# Altium PCB Analog_TestBoard.PcbDoc
Units mil, origin at the board's own origin, x right, y up, seen from the top; angles counter-clockwise.
Board outline 2154 x 1772 mil, 2 copper layers (Top Layer, Bottom Layer); 94 components, 43 nets, 214 pads, 24 vias.
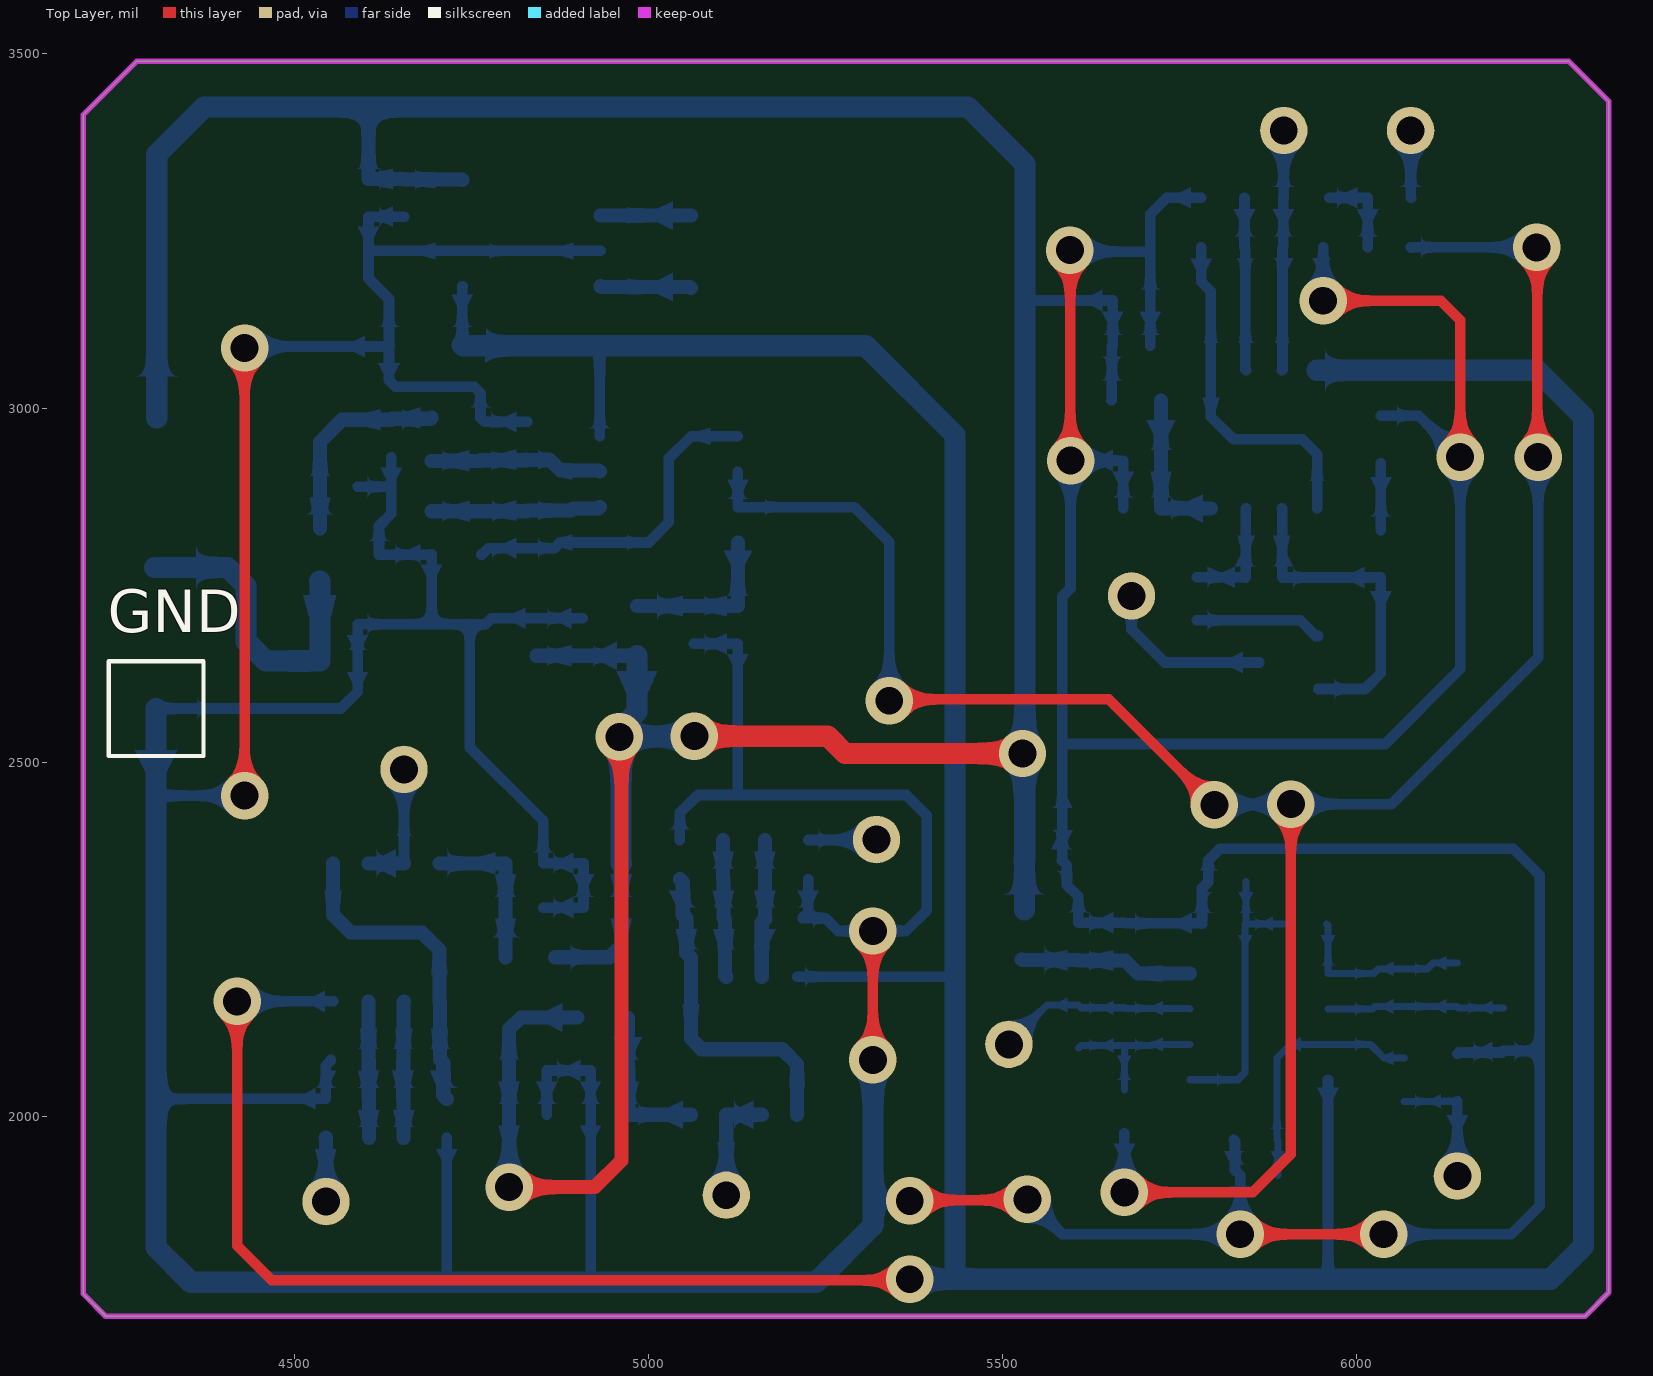
[diagram p0: Top Layer view]
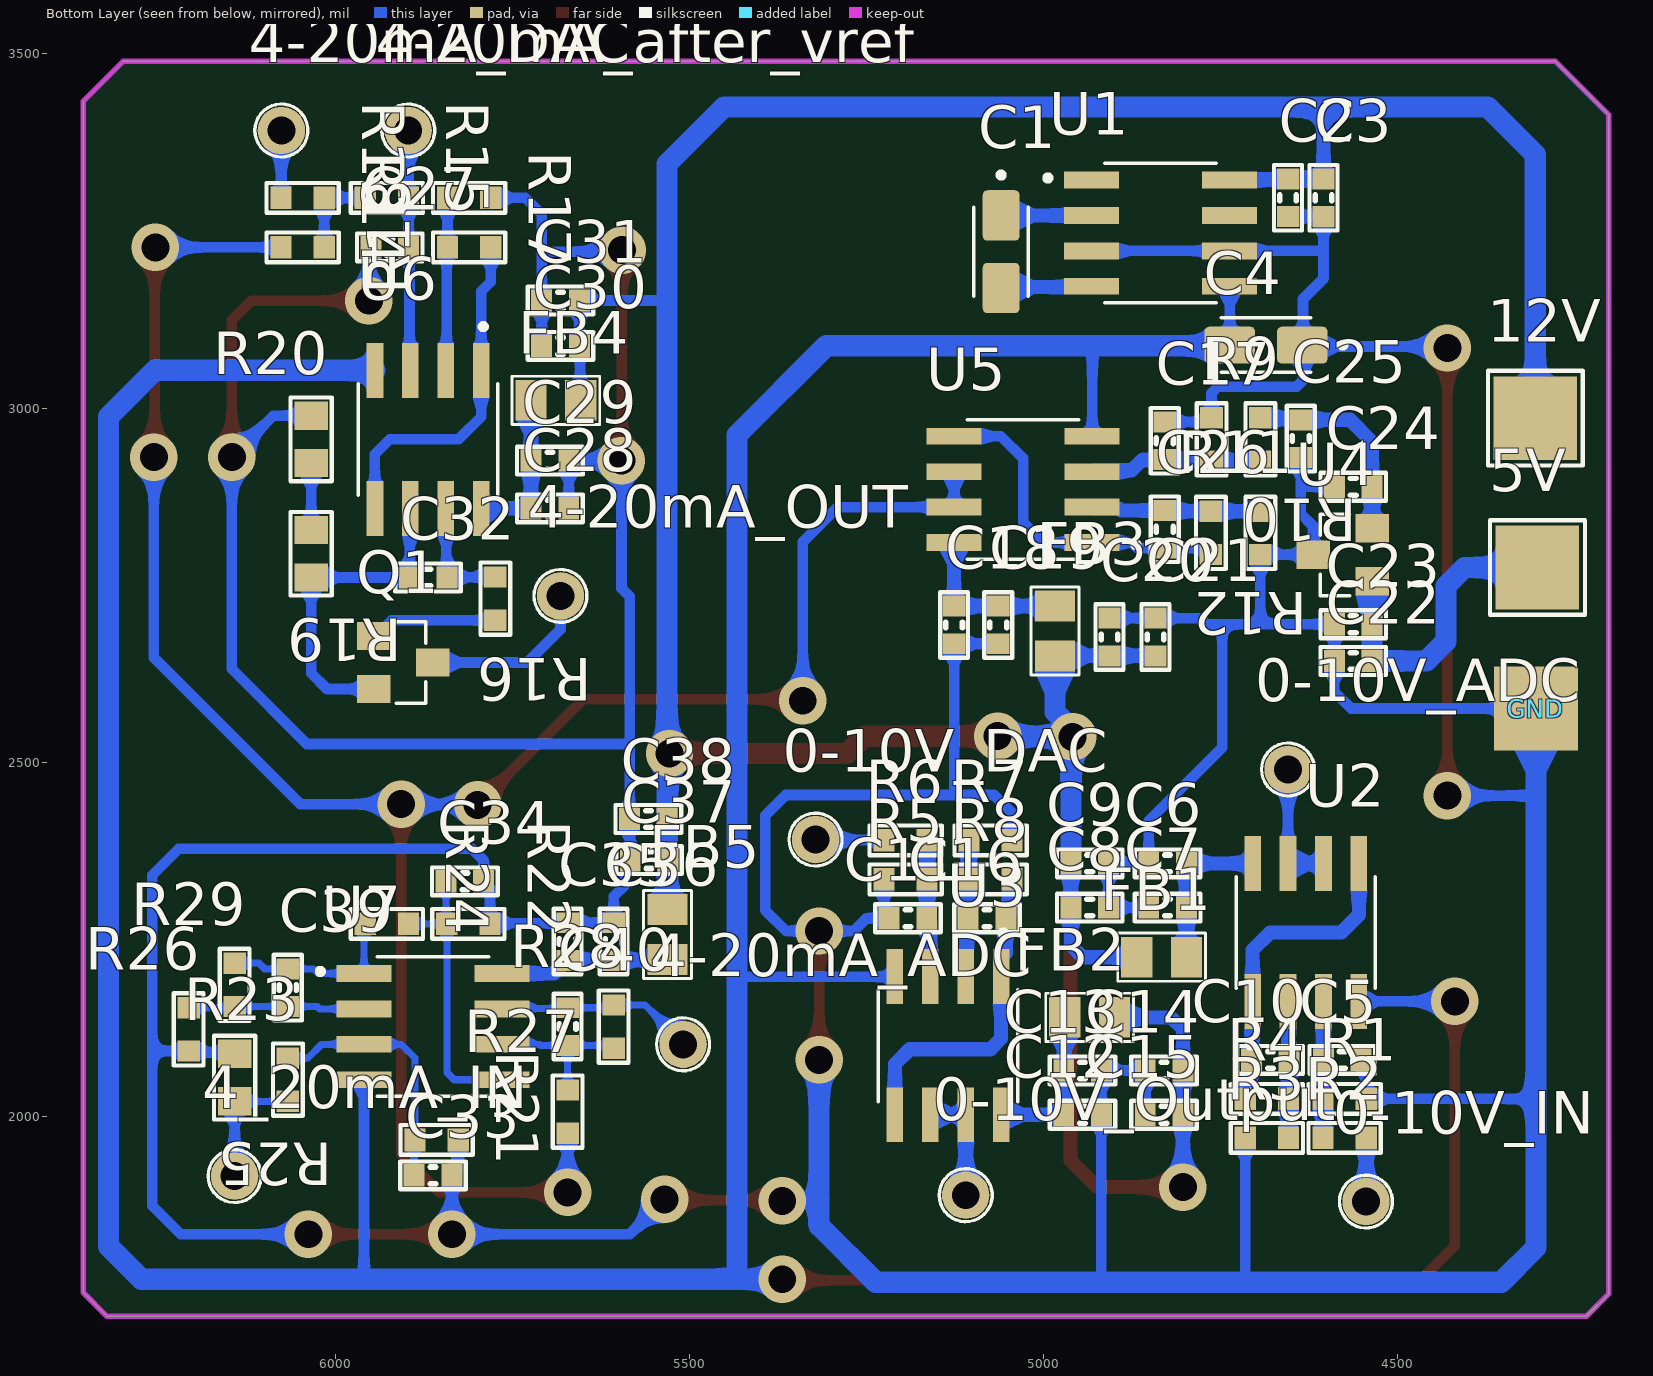
[diagram p1: Bottom Layer view, seen from below]
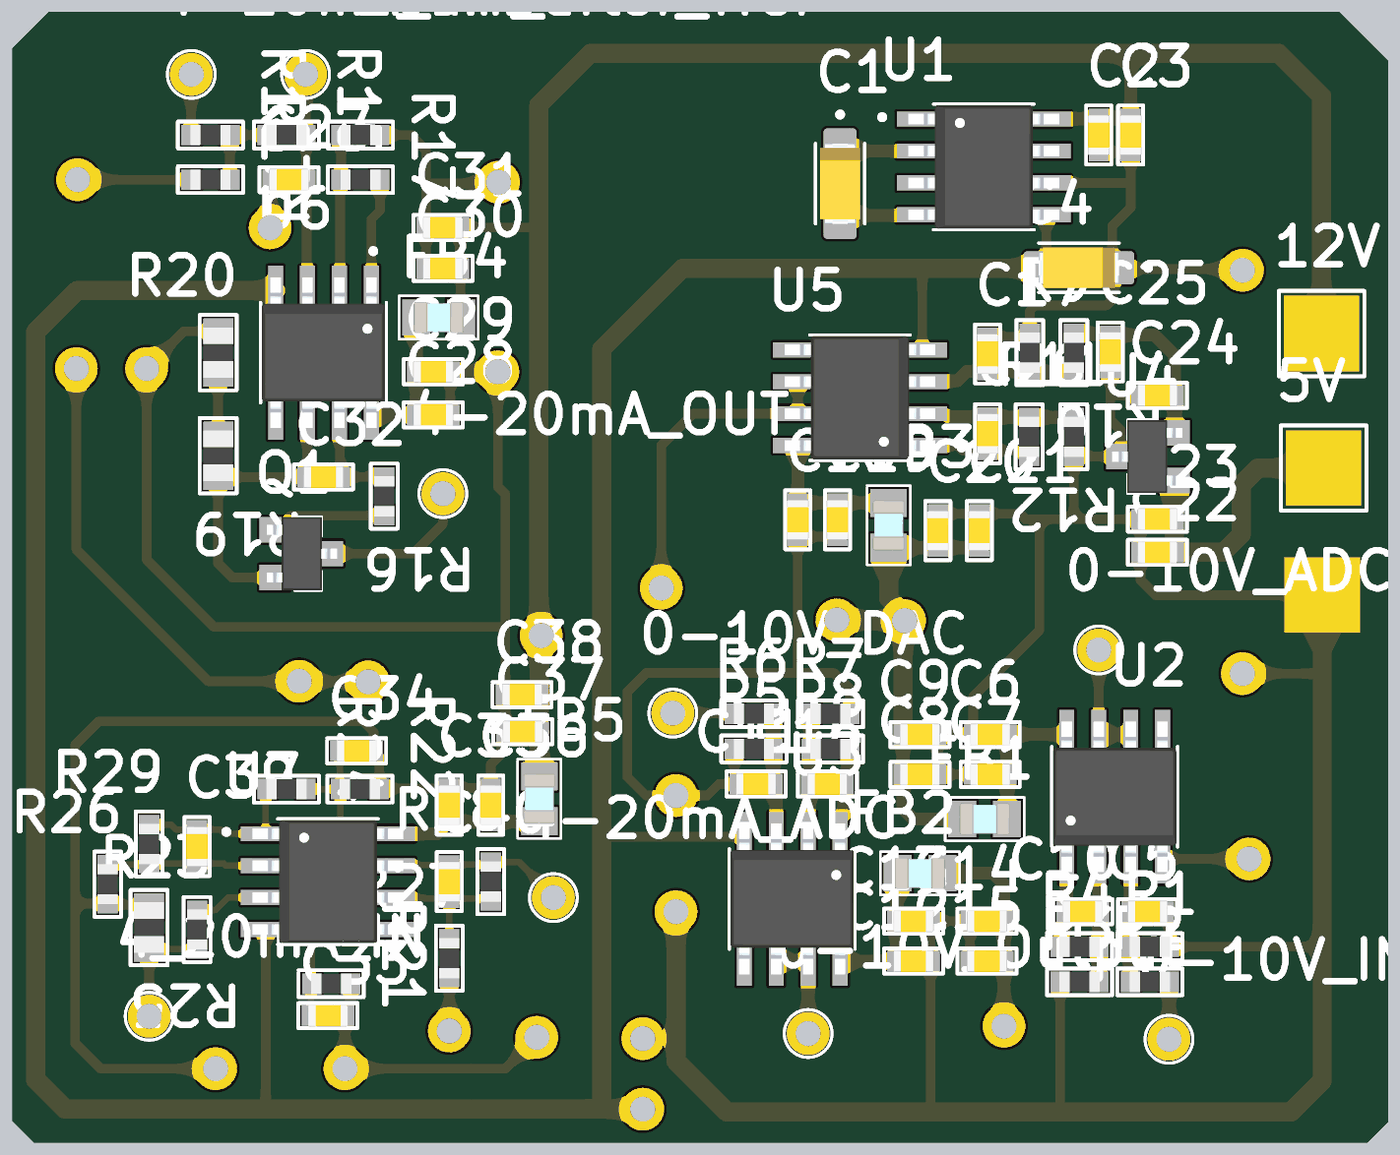
[diagram p2: 3D render of the assembled board from below, using the file's embedded part models]

## Layer stack, top to bottom
Top Solder: solder mask 0.4, Solder Resist, Dk 3.5
Top Layer: signal copper 1.4
Dielectric 1: dielectric 12.6, FR-4, Dk 4.8
Bottom Layer: signal copper 1.4
Bottom Solder: solder mask 0.4, Solder Resist, Dk 3.5

## Board outline
4202,1750 4202,3414 4278,3490 6299,3490 6356,3433 6356,1752 6322,1718 4234,1718

## Design rules (kind name [scope] priority, off if disabled: settings)
Clearance [All] p1: gap=15 ignorepadtopadclearanceinfootprint=FALSE
PolygonConnect [All] p1: connectstyle=Relief reliefconductorwidth=10 reliefentries=4 polygonreliefangle="90 Angle" airgapwidth=10
RoutingVias [All] p1: holewidth=39.37 width=66.93 viastyle="Through Hole" minholewidth=39.37 minwidth=66.93 maxholewidth=39.37 maxwidth=66.93
SolderMaskExpansion [All] p1: expansion=4 istentingtop=FALSE
SupplyNets "Schematic Supply Nets_11" [InNet('12V_FILTER_2')] p1: voltage=0.000
SupplyNets "Schematic Supply Nets_10" [InNet('GND')] p2: voltage=0.000
SupplyNets "Schematic Supply Nets_9" [InNet('-12V')] p3: voltage=0.000
SupplyNets "Schematic Supply Nets_8" [InNet('12V_FILTER_1')] p4: voltage=0.000
SupplyNets "Schematic Supply Nets_6" [InNet('12V_FILTER_3')] p5: voltage=0.000
SupplyNets "Schematic Supply Nets_5" [InNet('12V_FILTER_5')] p6: voltage=0.000
SupplyNets "Schematic Supply Nets_3" [InNet('12V_FILTER_4')] p7: voltage=0.000
SupplyNets "Schematic Supply Nets_2" [InNet('2V5')] p8: voltage=0.000
SupplyNets "Schematic Supply Nets_1" [InNet('12V')] p9: voltage=0.000
SupplyNets "Schematic Supply Nets" [InNet('5V')] p10: voltage=0.000
Width [All] p1: maxlimit=30 minlimit=10 preferedwidth=15
30 further rules are at their usual default settings.

## Classes and differential pairs
component class Power_Supply: 12V C1 C2 C3 C4 GND U1
component class 4-20mA_Converter: 4-20mA_ADC 4-20mA_after_vref 4-20mA_DAC 4-20mA_OUT 4_20mA_IN 5V C17 C18 C19 C20 C21 C22 C23 C24 C25 C26 C27 C28 C29 C30 C31 C32 C33 C34 C35 C36 C37 C38 C39 C40 FB3 FB4 FB5 Q1 R9 R10 R11 R12 R13 R14 R15 R16 R17 R18 R19 R20 R21 R22 R23 R24 R25 R26 R27 R28 R29 U4 U5 U6 U7
component class 0-10V_Converter: 0-10V_ADC 0-10V_DAC 0-10V_IN 0-10V_Output C5 C6 C7 C8 C9 C10 C11 C12 C13 C14 C15 C16 FB1 FB2 R1 R2 R3 R4 R5 R6 R7 R8 U2 U3

## Components (designator, comment, footprint, x,y, rotation, side; value= is the part's Value field where it differs from the comment)
0-10V_ADC "0-10V_ADC" TestPoint_THTPad_D1.5mm_Drill0.7mm 4655,2490 r90 bottom
0-10V_DAC "0-10V_DAC" TestPoint_THTPad_D1.5mm_Drill0.7mm 5322,2391 r270 bottom
0-10V_IN "0-10V_IN" TestPoint_THTPad_D1.5mm_Drill0.7mm 4545,1880 r90 bottom
0-10V_Output "0-10V_Output" TestPoint_THTPad_D1.5mm_Drill0.7mm 5110,1889 r270 bottom
4-20mA_ADC "4-20mA_ADC" TestPoint_THTPad_D1.5mm_Drill0.7mm 5509,2102 r90 bottom
4-20mA_after_vref "4-20mA_after_vref" TestPoint_THTPad_D1.5mm_Drill0.7mm 5897,3392 r0 bottom
4-20mA_DAC "4-20mA_DAC" TestPoint_THTPad_D1.5mm_Drill0.7mm 6076,3392 r0 bottom
4-20mA_OUT "4-20mA_OUT" TestPoint_THTPad_D1.5mm_Drill0.7mm 5682,2735 r0 bottom
4_20mA_IN "4_20mA_IN" TestPoint_THTPad_D1.5mm_Drill0.7mm 6142,1916 r90 bottom
5V "Testpoint_SMD" TestPoint_Pad_3.0x3.0mm#1 4303,2775 r90 bottom
12V "Testpoint_SMD" TestPoint_Pad_3.0x3.0mm#1 4306,2986 r180 bottom
C1 "10uF/16V" TanTa_Cap_A 5060,3220.82 r270 bottom
C2 "100nF/50V" CAP_0603 4655,3297 r90 bottom
C3 "10uF/16V" CAP_0603 4605,3297 r90 bottom
C4 "10uF/16V" TanTa_Cap_A 4686,3089 r0 bottom
C5 "2.2nF/50V" CAP_0603 4578.43,2080 r180 bottom
C6 "100nF/50V" CAP_0603 4825,2357.44 r180 bottom
C7 "10uF/16V" CAP_0603 4825,2295 r180 bottom
C8 "100nF/50V" CAP_0603 4935,2295 r0 bottom
C9 "10uF/16V" CAP_0603 4935,2357.44 r0 bottom
C10 "2.2nF/50V" CAP_0603 4680,2080 r0 bottom
C11 "2.2nF/50V" CAP_0603 5191.57,2280 r0 bottom
C12 "100nF/50V" CAP_0603 4945,2002.56 r0 bottom
C13 "10uF/16V" CAP_0603 4945,2065 r0 bottom
C14 "100nF/50V" CAP_0603 4830,2065 r180 bottom
C15 "10uF/16V" CAP_0603 4830,2002.56 r180 bottom
C16 "2.2nF/50V" CAP_0603 5080,2280 r180 bottom
C17 "2.2nF/50V" CAP_0603 4829,2954 r90 bottom
C18 "100nF/50V" CAP_0603 5126.32,2694 r90 bottom
C19 "10uF/16V" CAP_0603 5064,2694 r90 bottom
C20 "100nF/50V" CAP_0603 4907,2677 r270 bottom
C21 "10uF/16V" CAP_0603 4842,2677 r270 bottom
C22 "10uF/16V" CAP_0603 4563,2643 r180 bottom
C23 "100nF/50V" CAP_0603 4563,2695 r180 bottom
C24 "100nF/50V" CAP_0603 4563,2889 r180 bottom
C25 "10uF/6.3V" CAP_0603 4637,2957 r90 bottom
C26 "2.2nF/50V" CAP_0603 4829,2829 r270 bottom
C27 "470pF/50V" CAP_0603 5923,3227 r180 bottom
C28 "100nF/50V" CAP_0603 5697,2858.56 r0 bottom
C29 "10uF/16V" CAP_0603 5697,2926 r0 bottom
C30 "100nF/50V" CAP_0603 5682,3088 r180 bottom
C31 "10uF/16V" CAP_0603 5682,3152 r180 bottom
C32 "100nF/50V" CAP_0603 5869,2761 r180 bottom
C33 "2.2nF/50V" CAP_0603 5862,1917 r180 bottom
C34 "2.2nF/50V" CAP_0603 5817,2332 r180 bottom
C35 "100nF/50V" CAP_0603 5672,2247 r270 bottom
C36 "10uF/16V" CAP_0603 5607,2247 r270 bottom
C37 "100nF/50V" CAP_0603 5557,2362 r180 bottom
C38 "10uF/16V" CAP_0603 5558,2420 r180 bottom
C39 "2.2nF/50V" CAP_0603 6067,2182 r90 bottom
C40 "2.2nF/50V" CAP_0603 5672,2127 r90 bottom
FB1 "120Ohm" Ferrite_Bead_0805 4833.53,2225 r0 bottom
FB2 "120Ohm" Ferrite_Bead_0805 4935,2140 r180 bottom
FB3 "120Ohm" Ferrite_Bead_0805 4984,2685.47 r270 bottom
FB4 "120Ohm" Ferrite_Bead_0805 5688.47,3011 r180 bottom
FB5 "120Ohm" Ferrite_Bead_0805 5531,2257 r90 bottom
GND "Testpoint_SMD" TestPoint_Pad_3.0x3.0mm#2 4305,2576 r0 top
Q1 "SI2308" SOT-23 5904,2641 r270 bottom
R1 "30K/1%/1_10W" Resistor_0603 4575,2025 r180 bottom
R2 "100K/1%/1_10W" Resistor_0603 4575,1970 r0 bottom
R3 "100K/1%/1_10W" Resistor_0603 4685,1970 r180 bottom
R4 "30K/1%/1_10W" Resistor_0603 4685,2025 r0 bottom
R5 "100K/1%/1_10W" Resistor_0603 5195,2335 r0 bottom
R6 "30K/1%/1_10W" Resistor_0603 5195,2390 r180 bottom
R7 "30K/1%/1_10W" Resistor_0603 5075,2390 r0 bottom
R8 "100K/1%/1_10W" Resistor_0603 5075,2335 r180 bottom
R9 "30K/1%/1_10W" Resistor_0603 4763,2956 r90 bottom
R10 "100K/1%/1_10W" Resistor_0603 4694,2956 r270 bottom
R11 "100K/1%/1_10W" Resistor_0603 4694,2824 r90 bottom
R12 "30K/1%/1_10W" Resistor_0603 4764,2824 r270 bottom
R13 "100K/1%/1_10W" Resistor_0603 6046,3297 r180 bottom
R14 "100K/1%/1_10W" Resistor_0603 6046,3227 r180 bottom
R15 "51R/5%/1_10W" Resistor_0603 5927,3297 r180 bottom
R16 "100R/1%/1_8W" Resistor_0603 5774,2731 r270 bottom
R17 "100K/1%/1_10W" Resistor_0603 5811,3227 r180 bottom
R18 "100K/1%/1_10W" Resistor_0603 5811,3297 r0 bottom
R19 "180R/1%/1_8W" Resistor_0805 6034,2794.5 r270 bottom
R20 "8.2R/5%/1_8W" Resistor_0805 6034,2956 r90 bottom
R21 "56K/1%/1_10W" Resistor_0603 5857,1967 r180 bottom
R22 "100K/1%/1_10W" Resistor_0603 5812,2272 r180 bottom
R23 "53.6K/1%/1_10W" Resistor_0603 6067,2052 r90 bottom
R24 "100K/1%/1_10W" Resistor_0603 5927,2272 r180 bottom
R25 "180R/1%/1_8W" Resistor_0805 6142,2055 r270 bottom
R26 "53.6K/1%/1_10W" Resistor_0603 6207,2123 r90 bottom
R27 "100K/1%/1_10W" Resistor_0603 5672,2007 r90 bottom
R28 "100K/1%/1_10W" Resistor_0603 5607,2127 r90 bottom
R29 "56K/1%/1_10W" Resistor_0603 6142,2186 r90 bottom
U1 "ICL7662CBA" SOIC-8 4835,3247 r180 bottom
U2 "NE5532DR" SOIC-8 4630,2260 r90 bottom
U3 "NE5532DR" SOIC-8 5135,2100 r270 bottom
U4 "MCP1525T-I/TT" SOT-23 4578,2793 r90 bottom
U5 "NE5532DR" SOIC-8 5028.88,2885.38 r0 bottom
U6 "NE5532DR" SOIC-8 5869,2956 r270 bottom
U7 "NE5532DR" SOIC-8 5862,2127 r180 bottom

## Footprints (in the part's own frame and the unit in brackets; to place one, negate y for a bottom-side part, rotate by r counter-clockwise, add the part's x,y. Pads: shape width x height; smd on the part's side, far side on the other; paste and mask are expansions set on the pad)
CAP_0603 [mm]
  rect 0.75x0.8 smd: 1(-0.675,0) 2(0.675,0)
  silkscreen extent -1.17,-0.5 1.17,0.5, body extent -0.8,-0.43 0.8,0.43, height 0.8
Ferrite_Bead_0805 [mil] "Ferrite  Bead, body 2.00x1.20mm"
  rect 44x57 smd: 1(-35.11,0) 2(35.11,0)
  silkscreen extent -62,-34 62,34, body extent -39,-25 39,25, height 41
Resistor_0603 [mil]
  rect 30x32 smd: 1(-30.5,0) 2(30.5,0)
  silkscreen extent -51,-21 51,21, body extent -31,-16 31,16, height 28
Resistor_0805 [mil] "Chip Resistor, 2-Leads, Body 2,00x1,20mm, IPC Medium Density"
  rect 40x47 smd: 1(-33.5,0) 2(33.5,0)
  silkscreen extent -59,-29 59,29, body extent -39,-24 39,24, height 28
SOIC-8 [mm]
  rect 1.97x0.6 smd: 1(-2.475,1.905) 2(-2.475,0.635) 3(-2.475,-0.635) 4(-2.475,-1.905) 5(2.475,-1.905) 6(2.475,-0.635) 7(2.475,0.635) 8(2.475,1.905)
  silkscreen extent -4.14,-2.5 2,2.5, body extent -3,-2.45 3,2.45, height 1.7
SOT-23 [mm]
  rect 1.016x1.2 smd: 1(-0.95,-1.06) 2(0.95,-1.06) 3(0,1.06)
  silkscreen extent -1.46,-0.25 1.46,0.8, body extent -1.45,-1.37 1.45,1.43, height 1.3
TanTa_Cap_A [mm] "Size 1206"
  rrect25% 1.81x1.32 smd: 1(-1.3,0) 2(1.3,0)
  silkscreen extent -2.85,-0.98 1.6,0.98, body extent -1.6,-0.8 1.6,0.8, height 1.8
TestPoint_Pad_3.0x3.0mm#1 [mm]
  rect 3x3 smd paste-2539.97 mask+0: 1(0,0)
  silkscreen extent -1.7,-1.7 1.7,1.7
TestPoint_Pad_3.0x3.0mm#2 [mm]
  rect 3x3 smd far side paste-2539.97 mask+0: 1(0,0)
  silkscreen extent -1.7,-1.7 1.7,1.7
TestPoint_THTPad_D1.5mm_Drill0.7mm [mm]
  round 1.7 / inner round 1.524 / far side round 1.7 hole 1 paste-2539.97 mask+0: 1(0,0)
  silkscreen extent -0.95,-0.95 0.95,0.95

## Part data
0-10V_ADC 0-10V_DAC 0-10V_IN 0-10V_Output 4-20mA_ADC 4-20mA_after_vref 4-20mA_DAC 4-20mA_OUT 4_20mA_IN: library part Testpoint_TH, "Test Point TEST-1BK", Supply Name=BanLinhKien, Supply Part Number="Test Point TEST-1BK", Supply URL=https://banlinhkien.com/test-point-test1bk-mau-den-5c-p18255999.html
C1 C4: library part Tanta_Cap_10uF_16V_1206, "Tantalum Capacitors 10uF 16V 1206", Supply Part Number=AVX, Supply Name="1206 AVX"
C2 C6 C8 C12 C14 C18 C20 C23 C24 C28 C30 C32 C35 C37: library part Ceramic_Cap_100nF_50V_0603, "CAP, size 0603, 100nF, 50V", Supply Part Number="Tụ Gốm 0603 100nF (0.1uF) 50V", Supply Name=Thegioiic, Supply URL=https://www.thegioiic.com/tu-gom-0603-100nf-0-1uf-50v
C3 C7 C9 C13 C15 C19 C21 C22 C29 C31 C36 C38: library part Ceramic_Cap_10uF_16V_0603, "CAP, size 0603, 10uF, 16V", Supply Part Number="Tụ Gốm 0603 10uF 16V", Supply Name=Thegioiic, Supply URL=https://www.thegioiic.com/tu-gom-0603-10uf-16v
C5 C10 C11 C16 C17 C26 C33 C34 C39 C40: library part Ceramic_Cap_2.2nF_50V_0603, "CAP, size 0603, 2.2nF, 50V", Supply Part Number=CC0603KRX7R9BB222, Supply Name=tme, Supply URL=http://www.tme.vn/Product.aspx?id=1310#page=pro_info
C25: library part Ceramic_Cap_10uF_6.3V_0603, "CAP, size 0603, 10uF, 6.3V", Supply Part Number=CC0603KRX5R5BB106, Supply Name=tme, Supply URL=http://www.tme.vn/Product.aspx?id=1165#page=pro_info
C27: library part Ceramic_Cap_470pF_50V_0603, "CAP, size 0603, 470pF, 50V", Supply Part Number="Tụ Gốm 0603 470pF 50V", Supply Name=Thegioiic, Supply URL=https://www.thegioiic.com/tu-gom-0603-470pf-50v
FB1 FB2 FB3 FB4 FB5: library part Ferrite_Bead_120Ohm_2A_0805, "Ferrite Bead, size 0805, 120Ohm, 2A", Supply Part Number="CBW201209U121T Ferrite Beads 2A 120 Ohm 0805", Supply Name=Thegioiic, Supply URL=https://www.thegioiic.com/cbw201209u121t-ferrite-beads-2a-120-ohm-0805
Q1: "SI2308 SOT23 MOSFET N-CH 2A 60V", datasheet=https://www.mouser.vn/datasheet/2/427/si2308bd-1765649.pdf, Supply Name=BanLinhKien, Supply Part Number="SI2308 SOT23 MOSFET N-CH 2A 60V", Supply URL=https://banlinhkien.com/si2308-sot23-mosfet-nch-2a-60v-smda8s-5c-p15289840.html
R1 R4 R6 R7 R9 R12: library part Res_30K_0603_1%, "Resistor 0603 30KOhm 1% 1_10W", Supply Part Number="Điện Trở 30 KOhm 0603 1%", Supply Name=LinhkienX, Supply URL=https://linhkienx.com/vi/dien-tro-30-kohm-0603-1-
R2 R3 R5 R8 R10 R11 R13 R14 R17 R18 R22 R24 R27 R28: library part Res_100K_0603_1%, "Resistor 0603 100KOhm 1% 1_10W", Supply Part Number="Điện Trở 100 KOhm 0603 1%", Supply Name=Thegioiic, Supply URL=https://www.thegioiic.com/dien-tro-100-kohm-0603-1-
R15: library part Res_51R_0603_5%, "Resistor 0603 51 Ohm 5% 1_10W", Supply Part Number="Điện Trở 51 Ohm 0603 5%", Supply Name=Thegioiic, Supply URL=https://www.thegioiic.com/dien-tro-51-ohm-0603-5-
R16: library part Res_100R_0805_1%, "Resistor 0805 100 Ohm 1% 1_8W", Supply Part Number="Điện Trở 100 Ohm 0805 1%", Supply Name=Thegioiic, Supply URL=https://www.thegioiic.com/dien-tro-100-ohm-0805-1-
R19 R25: library part Res_180R_0805_1%, "Resistor 0805 180 Ohm 1% 1_8W", Supply Part Number="Điện Trở 180 Ohm 0805 1%", Supply Name=Thegioiic, Supply URL=https://www.thegioiic.com/dien-tro-180-ohm-0805-1-
R20: library part Res_8.2R_0805_5%, "Resistor 0805 8.2 Ohm 5% 1_8W", Supply Part Number="Điện Trở 8.2 Ohm 0805 5%", Supply Name=Thegioiic, Supply URL=https://www.thegioiic.com/dien-tro-8-2-ohm-0805-5-
R21 R29: library part Res_56K_0603_1%, "Resistor 0603 56KOhm 1% 1_10W", Supply Part Number="Điện Trở 56 KOhm 0603 1%", Supply Name=Thegioiic, Supply URL=https://www.thegioiic.com/dien-tro-56-kohm-0603-1-
R23 R26: library part Res_53.6K_0603_1%, "Resistor 0603 53.6KOhm 1% 1_10W", Supply Part Number="Điện Trở 53.6 KOhm 0603 1%", Supply Name=Thegioiic, Supply URL=https://www.thegioiic.com/dien-tro-53-6-kohm-0603-1-
U1: "Vin: 4.5V ~ 20V, Vout: -Vin, 8-SOIC", Supply Part Number="IC Dán ICL7662", datasheet=https://www.analog.com/media/en/technical-documentation/data-sheets/icl7662-si7661.pdf, Supply Name=Chipn24, Supply URL=https://chipn24.com/sop-ic-dan-icl7662-sop-8-smd-icl7662cba-id9015.html
U2 U3 U5 U6 U7: "Low Noise Single/Dual Operational Amplifier - SOIC-8", datasheet=https://www.ti.com/lit/ds/symlink/ne5532.pdf, Supply Name=tme, Supply Part Number=NE5532DR, Supply URL=http://www.tme.vn/Product.aspx?id=2122#page=pro_info
U4: "Voltage Reference IC 2.5V", Supply Part Number="MCP1525T-I/TT IC Tham Chiếu Điện Áp 2.5V SOT-23", datasheet=https://ww1.microchip.com/downloads/aemDocuments/documents/APID/ProductDocuments/DataSheets/21653C.pdf, Supply Name=Thegioiic, Supply URL=https://www.thegioiic.com/mcp1525t-i-tt-ic-tham-chieu-dien-ap-2-5v-sot-23

## Via types
v1: diameter 66.93, hole 39.37, Top Layer to Bottom Layer, 24 vias

## Nets (pads, with @x,y where several pads share a name; then routed paths per layer and width w, separated by ;. In a path a pad name is that pad's centre, name@x,y a point inside that pad or via, vN(x,y) a via of type N, cw(c..) or ccw(c..) an arc to the next point about the centre after c; other vN are vias at no path point)
2V5: C24.2 C25.2 R10.1 U4.2 | length 293.8
  Bottom Layer w20: U4.2 4536.35,2830.48 4536.35,2888.92 C24.2 4536.43,2952.43 4567.57,2983.57 C25.2 4638.46,2985.04 4692.54,2985.04 R10.1
5V: 5V.1 C22.2 C23.2 U4.1 | length 446.5
  Bottom Layer w30: 5V.1 4406,2775 4432,2749 4432,2671 4460,2643 C22.2 C23.2 4536.35,2695.08 4536.35,2755.52 U4.1
12V: 12V.1 C2.2 C3.2 C8.2 C9.2 C14.2 C15.2 C20.2 C21.2 C30.2 C31.2 C37.2 C38.2 FB1.2 FB2.2 FB3.2 FB4.2 FB5.2 U1.8 | length 5553.9
  Top Layer w20: v1(4803.43,1900.43) 4924.43,1900.43 4962,1938 4962,2533 v1(4959,2536)
  Top Layer w30: v1(5065,2537) 5253.25,2537 5277.76,2512.48 v1(5528.11,2512.48)
  Bottom Layer w15: 5531.52,3157 5536.52,3152 C31.2 C30.2 5654.39,3086.97 5654.39,3012.03 FB4.2 FB4.2@5653.89,3011.53
  Bottom Layer w20: 4605,3425 C3.2 C2.2 4655.79,3322.79 4736.77,3322.79 U1.8 ; v1(4803.43,1900.43) C15.2 C14.2 4803.43,2123.43 4820,2140 FB2.2 ; C21.2 C20.2 ; FB1.2 4945,2225 4961.57,2241.57 C8.2 C9.2 ; C20.2 FB3.2
  Bottom Layer w30: 12V.1 4306,3358 4373,3425 4605,3425 5451,3425 5531.52,3344.48 5531.52,3157 5531.52,2512.48 v1@5531.47,2512.44 ; v1@4961.34,2533.66 4961.34,2357.68 C9.2 ; FB3.2 4984,2570.99 4959,2545.99 v1(4959,2536) 4959.5,2536.5 5064.5,2536.5 v1(5065,2537) ; v1(5528.11,2512.48) 5531.19,2509.41 5531.19,2420.24 C38.2 5531.43,2363.51 C37.2@5530.43,2362.51 ; C37.2 5530.66,2361.76 5530.66,2359.45 5531,2359.11 FB5.2
12V_FILTER_1: C18.2 C19.2 FB3.1 U5.8 | length 232.1
  Bottom Layer w20: FB3.1 C19.2 C18.2 U5.8
12V_FILTER_2: C28.2 C29.2 FB4.1 U6.8 | length 222.9
  Bottom Layer w20: FB4.1 C29.2 C28.2 U6.8
12V_FILTER_3: C35.2 C36.2 FB5.1 U7.8 | length 244.8
  Bottom Layer w20: FB5.1@5527,2221.89 5527.73,2221.16 5606.27,2221.16 C36.2 C35.2 ; C35.2@5672.98,2220.43 5691.41,2202 U7.8
12V_FILTER_4: C6.2 C7.2 FB1.1 U2.8 | length 225.9
  Bottom Layer w20: U2.8 C6.2 C7.2 FB1.1
12V_FILTER_5: C12.2 C13.2 FB2.1 U3.8 | length 226.5
  Bottom Layer w20: FB2.1 4970.84,2139.27 4970.84,2065.73 C13.2 C12.2 U3.8
-12V: C4.2 U1.5 U2.4 U3.4 U5.4 U6.4 U7.4 | length 6654.2
  Top Layer w15: v1(4419.44,2162.56) 4419.44,1817.56 4468.23,1768.77 5367.37,1768.77 v1(5369,1770.4)
  Bottom Layer w15: v1(4419.44,2162.56) U2.4 ; C4.2 4737.18,3171.62 U1.5 ; U5.4 4931.44,3088 ; U3.4 5431.56,2197.44 5433,2196 ; 5959.44,1770.4 U7.4
  Bottom Layer w30: C4.2 4738.18,3088 4931.44,3088 5307,3088 5433,2962 5433,2196 5433,1777.2 5439.8,1770.4 ; v1(5369,1770.4) 5439.8,1770.4 ; U6.4 6254.56,3053.44 6320,2988 6320,1817 6273.4,1770.4 5959.44,1770.4 5439.8,1770.4
GND: C2.1 C3.1 C4.1 C5.2 C6.1 C7.1 C8.1 C9.1 C11.2 C12.1 C13.1 C14.1 C15.1 C17.2 C18.1 C19.1 C20.1 C21.1 C22.1 C23.1 C24.1 C25.1 C27.1 C28.1 C29.1 C30.1 C31.1 C33.2 C34.2 C35.1 C36.1 C37.1 C38.1 GND.1 R1.2 R3.1 R5.2 R7.1 R9.2 R11.1 R18.1 R20.2 R21.2 R22.2 R25.1 R26.1 U1.3 U1.6 U4.3 | length 13158.9
  Top Layer w15: v1(4430,2453) v1(4430,3085) ; v1(5317,2080) v1(5317,2262) ; v1(5369,1881) 5370,1882 5534,1882 v1(5535,1883) ; v1(5594.98,3223.02) 5595.49,3222.51 5595.49,2926.51 v1(5596,2926) ; v1(5835.43,1833.87) v1(6037.87,1833.87) ; v1(5952.57,3151.57) 6118.43,3151.57 6146,3124 v1(6146,2931)
  Bottom Layer w15: 4305,2025 R1.2 4544.5,2071.67 4551.85,2079.02 C5.2 ; 4305,2453 v1(4430,2453) ; GND.1 4566,2576 4589.57,2599.57 C22.1 C23.1 4694,2695 ; v1(4430,3085) 4432,3087 4632.82,3087 C4.1 ; C24.1 4635.29,2889 4637,2890.71 ; C25.1 4637,2890.71 ; C2.1 C3.1 4605,3224 ; 4714,1766 4715.5,1767.5 R3.1 ; C17.2 4768.93,2980.57 R9.2 4763,3021.21 4754.21,3030 4643,3030 4633.82,3039.18 4633.82,3154.18 4605,3183 4605,3224 ; C7.1 C8.1 C9.1 C6.1 4851.57,2417.43 4748,2521 4748,2695 ; C15.1 C14.1 C13.1 C12.1 4918.43,1766.57 4919,1766 ; C20.1 C21.1 4778.57,2703.57 4770,2695 4748,2695 ; U1.3 U1.6 4607,3222 4605,3224 ; R7.1 5044.5,2428.5 5070,2454 5127,2454 ; C19.1 C18.1 5126.32,2454.68 5127,2454 ; C11.2 5250,2280 5268,2262 v1(5317,2262) 5317.18,2262.18 5364.18,2262.18 5393,2291 5393,2425 5364,2454 5127,2454 ; C11.2@5218.15,2280.98 5225.5,2288.33 R5.2 ; 5317,1882.54 5367.46,1882.54 v1(5369,1881) ; v1(5535,1883) 5584.13,1833.87 v1(5835.43,1833.87) C33.2 5828.16,1924.26 5828.16,1965.34 R21.2 ; v1(5594.98,3223.02) 5597,3221 5707,3221 5708.57,3219.43 ; C28.1 C29.1 v1(5596,2926) 5596,2746 5584.07,2734.07 5584.07,2527 ; C30.1 C31.1 5708.57,3219.43 ; R18.1 5732,3297 5708.57,3273.57 5708.57,3219.43 ; R22.2 5780.71,2272.79 5672.79,2272.79 C35.1 C36.1 5607,2310.84 5590.84,2327 5590.84,2354.74 C37.1 5584.07,2362.5 5584.07,2527 ; R22.2@5781.5,2273 5781.5,2322.09 5790.46,2331.05 5790.46,2361.46 5807,2378 6221,2378 6258.17,2340.83 6258.17,2092.71 ; v1(5952.57,3151.57) C27.1@5952.57,3227 ; R20.2 6087.5,2989.5 v1(6146,2931) 6146,2632 6040,2526 5585.07,2526 5584.07,2527 ; v1(6037.87,1833.87) 6217.87,1833.87 6258.17,1874.17 6258.17,2092.71 ; R25.1 6144,2090.5 6205,2090.5 R26.1 6207.21,2092.71 6258.17,2092.71 ; 4637,2890.71 4637,2851 4619.73,2833.73 U4.3 4619.98,2793.25 4693.75,2793.25 R11.1 4694,2695 ; 4694,2695 4748,2695
  Bottom Layer w30: GND.1 4305,2453 4305,2025 4305,1815 4354,1766 4714,1766 4919,1766 5237,1766 5317,1846 5317,1882.54 v1(5317,2080)
Net0-10V_ADC_1: 0-10V_ADC.1 U2.6 U2.7 | length 182.6
  Bottom Layer w15: U2.7 0-10V_ADC.1
  Bottom Layer w20: U2.6 U2.7
Net0-10V_DAC_1: 0-10V_DAC.1 R6.1 | length 96.9
  Bottom Layer w15: R6.1 5226,2390.5 5321.5,2390.5 0-10V_DAC.1
Net0-10V_IN_1: 0-10V_IN.1 R2.1 | length 105.2
  Bottom Layer w20: R2.1 4544.75,1969.75 4544.75,1865.25 0-10V_IN.1@4545,1865
Net0-10V_Output_1: 0-10V_Output.1 U3.6 U3.7 | length 154.6
  Bottom Layer w20: 0-10V_Output.1@5110,1898 U3.7 U3.6
Net4-20mA_ADC_1: 4-20mA_ADC.1 C40.2 R28.2 U7.7 | length 282
  Bottom Layer w10: 4-20mA_ADC.1 5509,2104 5562.5,2157.5 R28.2 5610.93,2153.57 C40.2 5672.79,2152.79 5763.77,2152.79 U7.7
Net4-20mA_after_vref_1: 4-20mA_after_vref.1 C27.2 R15.2 U6.3 | length 339.7
  Bottom Layer w15: U6.3 5895.21,3054.65 5895.21,3225.79 C27.2 R15.2@5896.43,3296.93 ; R15.2 5896.75,3297.25 5896.75,3391.75 4-20mA_after_vref.1
Net4-20mA_DAC_1: 4-20mA_DAC.1 R13.1 | length 95.2
  Bottom Layer w15: 4-20mA_DAC.1 6076.25,3391.75 6076.25,3297.25 R13.1
Net4-20mA_OUT_1: 4-20mA_OUT.1 Q1.3 | length 246.8
  Bottom Layer w15: 4-20mA_OUT.1 5682,2687.95 5728.95,2641 Q1.3
Net4_20mA_IN_1: 4_20mA_IN.1 R23.1 R25.2 | length 180.5
  Bottom Layer w10: R23.1 R25.2
  Bottom Layer w15: 4_20mA_IN.1 R25.2
NetC1_1: C1.1 U1.2 | length 127.6
  Bottom Layer w20: U1.2 C1.1
NetC1_2: C1.2 U1.4 | length 128.5
  Bottom Layer w20: U1.4 4933.62,3170.82 5058.82,3170.82 C1.2
NetC5_1: C5.1 R1.1 R2.2 U2.3 | length 192.8
  Bottom Layer w20: U2.3 C5.1 4605.25,2079.75 4605.25,2025.25 R1.1 R2.2
NetC10_1: C10.1 R3.2 R4.1 U2.2 | length 193.7
  Bottom Layer w20: R3.2 R4.1 4653.96,2025.54 4653.96,2079.46 C10.1 4654.21,2080.79 4654.21,2161.77 U2.2
NetC10_2: C10.2 R4.2 U2.1 U2.5 | length 457.5
  Bottom Layer w20: U2.5 4555,2285 4580,2260 4680,2260 4705,2235 U2.1 4705.79,2161.77 4705.79,2080.79 C10.2 4710.5,2076.07 4710.5,2030 R4.2
NetC11_1: C11.1 R5.1 R6.2 U3.3 | length 193.9
  Bottom Layer w20: U3.3 5160,2274.02 C11.1@5165,2279.02 ; R6.2 R5.1 5164.75,2334.75 5164.75,2280.25 C11.1
NetC16_1: C16.1 R7.2 R8.1 U3.2 | length 194.4
  Bottom Layer w20: R7.2 R8.1 5106.04,2334.46 5106.04,2280.54 C16.1 5108.29,2278.29 5108.29,2199.15 U3.2
NetC16_2: C16.2 R8.2 U3.1 U3.5 | length 467.8
  Bottom Layer w20: R8.2 5048.66,2330.84 5048.66,2284.76 C16.2 5053.43,2230.98 5060,2224.41 5060,2110 5075,2095 5188.98,2095 5210,2073.98 U3.5
NetC17_1: C17.1 R9.1 R10.2 U5.3 | length 245.3
  Bottom Layer w20: R10.2 R9.1 4763.96,2926.46 4828.04,2926.46 C17.1 4829.68,2926.74 4861.26,2926.74 4875.81,2912.19 4929.63,2912.19 U5.3
NetC26_1: C26.1 R11.2 R12.1 U5.2 | length 238.4
  Bottom Layer w20: R11.2 C26.1@4827.93,2854.5 ; C26.1 4890.95,2855.57 4893.94,2858.57 4929.63,2858.57 U5.2
NetC26_2: C26.2 R12.2 U5.1 U5.5 | length 484.2
  Bottom Layer w15: R12.2 4765,2793.5 4773.93,2802.43 C26.2 4867.43,2802.43 4875.38,2810.38 U5.1 5000.38,2810.38 5029,2839 5029,2929 5060.38,2960.38 U5.5
NetC32_1: C32.1 Q1.2 R19.2 U6.6 | length 469.2
  Bottom Layer w15: U6.6 5894.79,2857.77 5894.79,2761.79 C32.1 R19.2 6034,2626 6011.6,2603.6 Q1.2
NetC32_2: C32.2 R16.1 U6.7 | length 166.8
  Bottom Layer w15: R16.1 5774.25,2761.25 5842.18,2761.25 C32.2 5843.21,2761.79 5843.21,2857.77 U6.7
NetC33_1: C33.1 R21.1 R23.2 U7.3 | length 361.6
  Bottom Layer w10: C33.1 5888.57,1965.93 R21.1 5887.5,2082.5 5907,2102 U7.3 6019,2102 6038.5,2082.5 R23.2
NetC34_1: C34.1 R22.1 R24.2 U7.5 | length 406.2
  Bottom Layer w10: U7.5 5832,2052 5842.5,2062.5 R22.1 ; C34.1 5843.57,2273.07 R22.1 ; R24.2 R22.1
NetC39_1: C39.1 R26.2 R29.1 U7.2 | length 249.8
  Bottom Layer w10: U7.2 6022,2152 6025.43,2155.43 C39.1 6141.93,2155.43 R29.1 6144,2153.5 R26.2
NetC39_2: C39.2 R24.1 R29.2 U7.1 | length 259.4
  Bottom Layer w10: R24.1 5959.44,2270.06 U7.1 6024,2202 6030.57,2208.57 C39.2 6099.57,2208.57 6107.5,2216.5 R29.2
NetC40_1: C40.1 R27.2 R28.1 U7.6 | length 222.8
  Bottom Layer w10: R28.1 5610.93,2100.43 C40.1 ; R27.2 C40.1 ; U7.6 5712,2102 5710.43,2100.43 C40.1
NetQ1_1: Q1.1 R16.2 | length 180.9
  Bottom Layer w15: R16.2 5920.01,2700.5 5942.11,2678.4 Q1.1
NetR13_2: R13.2 R14.2 R15.1 | length 124
  Bottom Layer w15: R15.1@5961.5,3297 R13.2 R14.2
NetR17_1: R17.1 R18.2 U6.2 | length 244.6
  Bottom Layer w15: R18.2 R17.1 5842.75,3225.75 5842.75,3054.69 U6.2
NetR17_2: R17.2 U6.1 U6.5 | length 493
  Bottom Layer w15: R17.2 5780.5,3178.5 5794,3165 U6.1 5794,2988 5826,2956 5923,2956 5944,2935 U6.5
NetR19_1: R19.1 R20.1 | length 94.5
  Bottom Layer w15: R19.1 R20.1
Vref_0.75V: R14.1 R27.1 U5.6 U5.7 | length 3165.7
  Top Layer w15: v1(5340,2587) 5342,2589 5650,2589 v1(5799,2440) ; v1(5672,1893) 5853,1893 5907,1947 v1(5907,2441) ; v1(6254,3227) 6255,3226 6255,2932 v1(6256,2931)
  Bottom Layer w15: U5.6 U5.7 5290.62,2860.38 5340,2811 v1(5340,2587) ; v1(5672,1893) R27.1 ; v1(5799,2440) 5799.5,2440.5 5906.5,2440.5 v1(5907,2441) 6049,2441 6256,2648 v1(6256,2931) ; R14.1@6077,3226.5 R14.1 v1(6254,3227)
pads on no net: U1.1 U1.7

## Keep-outs
Keep-Out Layer:
  lines w7.87: 4202,1750 4202,1792 4202,3414 4278,3490 6299,3490 6356,3433 6356,1752 6322,1718 4234,1718 4202,1750